# EAGLE board BrewTrollerPhoenix (EAGLE 7.1.0), part 1 of 2
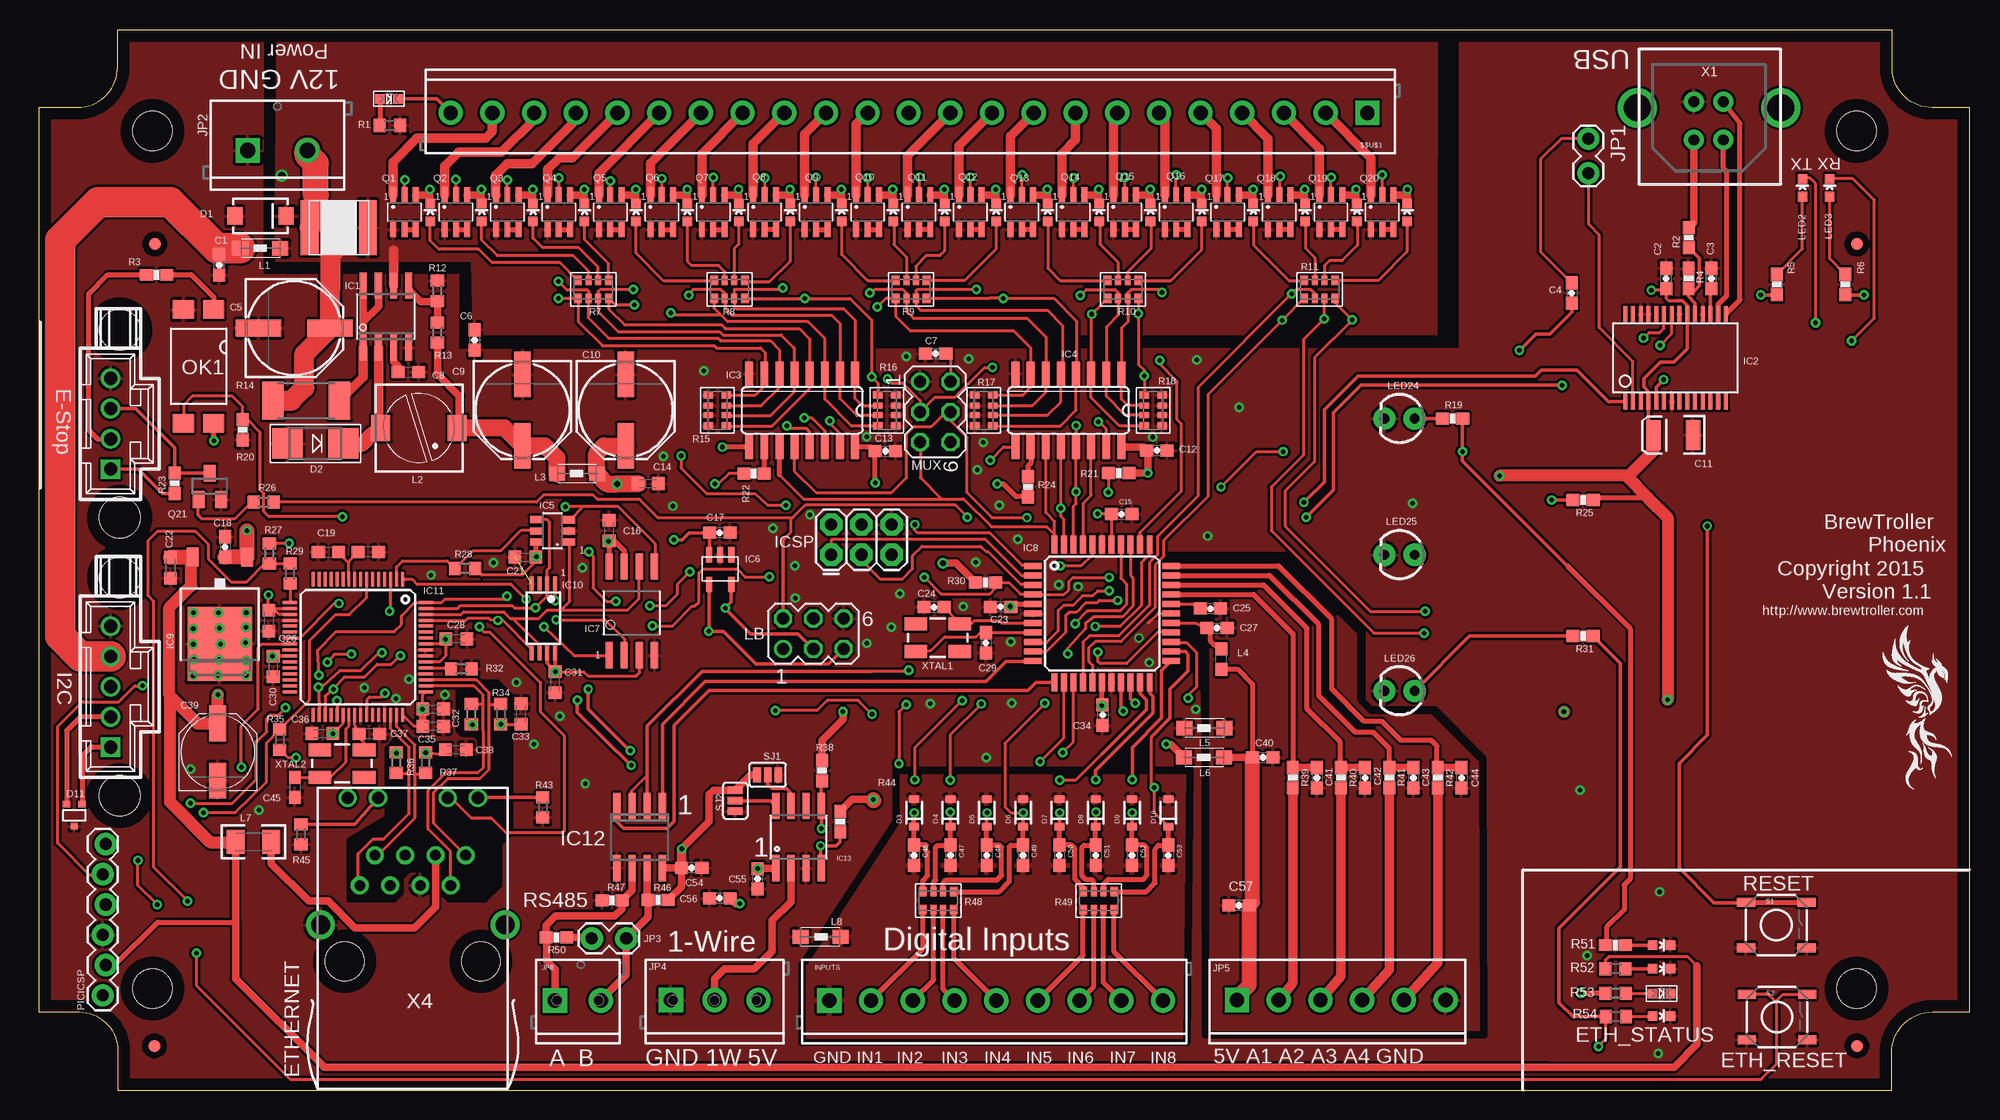
[diagram p0: board, top side]
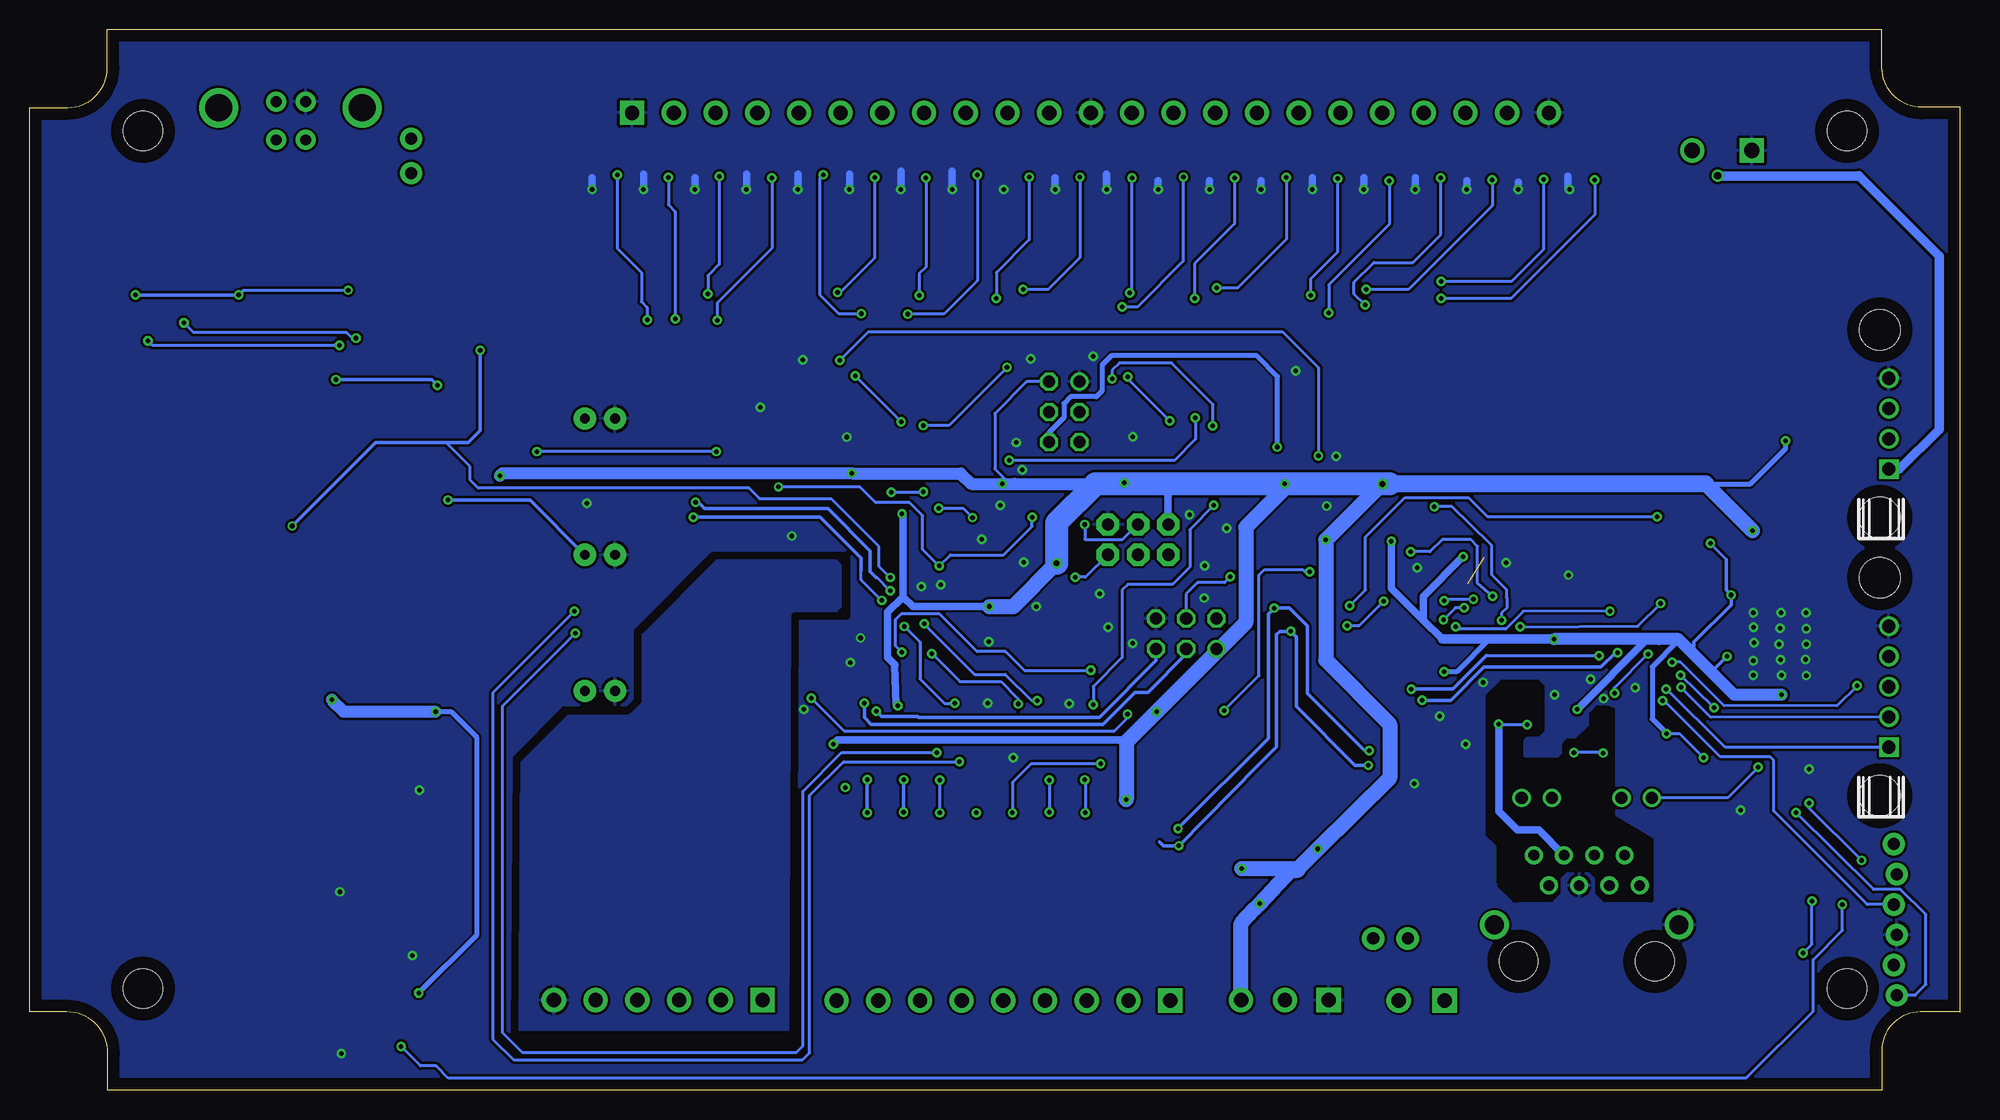
[diagram p1: board, bottom side, seen from below]

Size 162 x 89 mm. Coordinates in mm from the lower left corner, seen from the top.
Outline: 0,6.53 0,82.5 3.2,82.5 arc90 6.55,85.86 6.55,89 155.5,89 155.5,85.79 arc90 158.81,82.47 162,82.47 162,6.55 158.88,6.55 arc90 155.45,3.12 155.45,0 6.58,0 6.58,3.29 arc90 3.32,6.55 0,6.55
Copper layers (1*16): Top 0.035mm / dielectric 1.5mm / Bottom 0.035mm
Design rules "default": minimum track width 10mil, minimum drill 24mil, track to track 8mil, track to pad 8mil, pad to pad 8mil, via to via 8mil, smd to smd 8mil, copper to edge 40mil, drill to drill 10mil, minimum pad ring 10mil, minimum via ring 8mil, stop-mask expansion 0mil, vias tented up to drill 15mil, thermal gap 10mil
Net classes: 1 PWR: width 0.508 mm; 2 GND: width 0.635 mm
tRestrict: 53 lines
bRestrict: 49 lines

## Footprints (pad centres in the part's own frame; a part is rotated, then mirrored left to right if it is on the bottom)
STAND-OFF = hole 3.302: 0,0
FIDUCIAL_1MM = smd 1 x 1: 1 0,0
SCREWTERMINAL3.5MM-23 = drill 1.2 pad 2.032 square: 1 0,0 | drill 1.2 pad 2.032: 2 3.5,0; 3 7,0; 4 10.5,0; 5 14,0; 6 17.5,0; 7 21,0; 8 24.5,0; 9 28,0; 10 31.5,0; 11 35,0; 12 38.5,0; 13 41.94,0; 14 45.44,0; 15 48.94,0; 16 52.44,0; 17 55.94,0; 18 59.44,0; 19 62.94,0; 20 66.44,0; 21 69.94,0; 22 73.44,0; 23 76.94,0
0603-CAP = smd 1.1 x 1: 1 -0.85,0; 2 0.85,0
PANASONIC_E = smd 3.8 x 1.4: + 3,0; - -3,0
C0603 = smd 1.1 x 1: 1 -0.85,0; 2 0.85,0
EIA3528 = smd 1.2 x 2.5: A 1.65,0; C -1.65,0
C0603K = smd 1.05 x 1.08: 1 -0.875,0; 2 0.875,0
PANASONIC_D = smd 3 x 1.4: + 2.4,0; - -2.4,0
SMA-DIODE = smd 1.27 x 1.47: A -2.15,0; C 2.15,0
SMADIODE = smd 2.54 x 2.54: A 2.349,0; C -2.349,0
SOD-323 = smd 0.63 x 0.83: 1 -1.15,0; 2 1.15,0
SOT23-3 = smd 0.6 x 0.55: 1 -0.65,-0.925; 2 0.65,-0.925; 3 0,0.925
SOIC8 = smd 0.6 x 2.2: 1 -1.905,-2.6; 2 -0.635,-2.6; 3 0.635,-2.6; 4 1.905,-2.6; 5 1.905,2.6; 6 0.635,2.6; 7 -0.635,2.6; 8 -1.905,2.6
SSOP28DB = smd 0.348 x 1.397: 1 -4.225,-3.656; 2 -3.575,-3.656; 3 -2.925,-3.656; 4 -2.275,-3.656; 5 -1.625,-3.656; 6 -0.975,-3.656; 7 -0.325,-3.656; 8 0.325,-3.656; 9 0.975,-3.656; 10 1.625,-3.656; 11 2.275,-3.656; 12 2.925,-3.656; 13 3.575,-3.656; 14 4.225,-3.656; 15 4.225,3.656; 16 3.575,3.656; 17 2.925,3.656; 18 2.275,3.656; 19 1.625,3.656; 20 0.975,3.656; 21 0.325,3.656; 22 -0.325,3.656; 23 -0.975,3.656; 24 -1.625,3.656; 25 -2.275,3.656; 26 -2.925,3.656; 27 -3.575,3.656; 28 -4.225,3.656
SO16 = smd 0.66 x 2.032: 1 -4.445,-3.073; 2 -3.175,-3.073; 3 -1.905,-3.073; 4 -0.635,-3.073; 5 0.635,-3.073; 6 1.905,-3.073; 7 3.175,-3.073; 8 4.445,-3.073; 9 4.445,3.073; 10 3.175,3.073; 11 1.905,3.073; 12 0.635,3.073; 13 -0.635,3.073; 14 -1.905,3.073; 15 -3.175,3.073; 16 -4.445,3.073
SOT23-6 = smd 0.6 x 1: 1 -0.95,-1.39; 2 0,-1.39; 3 0.93,-1.41; 4 0.95,1.38; 5 -0.01,1.37; 6 -0.95,1.39
SOT-23A-5 = smd 0.508 x 1.27: GND 0.94,0; NC 0,0; SCLK 1.88,2.489; SDA 0,2.489; VDD 1.88,0
SO8W = smd 0.61 x 2.21: 1 -1.905,-3.569; 2 -0.635,-3.569; 3 0.635,-3.569; 4 1.905,-3.569; 5 1.905,3.886; 6 0.635,3.886; 7 -0.635,3.886; 8 -1.905,3.886
TQFP44 = smd 1.5 x 0.5: 1 -5.8,4; 2 -5.8,3.2; 3 -5.8,2.4; 4 -5.8,1.6; 5 -5.8,0.8; 6 -5.8,0; 7 -5.8,-0.8; 8 -5.8,-1.6; 9 -5.8,-2.4; 10 -5.8,-3.2; 11 -5.8,-4; 23 5.8,-4; 24 5.8,-3.2; 25 5.8,-2.4; 26 5.8,-1.6; 27 5.8,-0.8; 28 5.8,0; 29 5.8,0.8; 30 5.8,1.6; 31 5.8,2.4; 32 5.8,3.2; 33 5.8,4 | smd 0.5 x 1.5: 12 -4,-5.8; 13 -3.2,-5.8; 14 -2.4,-5.8; 15 -1.6,-5.8; 16 -0.8,-5.8; 17 0,-5.8; 18 0.8,-5.8; 19 1.6,-5.8; 20 2.4,-5.8; 21 3.2,-5.8; 22 4,-5.8; 34 4,5.8; 35 3.2,5.8; 36 2.4,5.8; 37 1.6,5.8; 38 0.8,5.8; 39 0,5.8; 40 -0.8,5.8; 41 -1.6,5.8; 42 -2.4,5.8; 43 -3.2,5.8; 44 -4,5.8
TO252 = smd 1 x 1.6: 1 -2.28,-4.8; 2 2.28,-4.8 | smd 5.4 x 6.2: 3 0,2.5
TSSOP8 = smd 1.2 x 0.35: 1 -2.925,0.975; 2 -2.925,0.325; 3 -2.925,-0.325; 4 -2.925,-0.975; 5 2.925,-0.975; 6 2.925,-0.325; 7 2.925,0.325; 8 2.925,0.975
TQFP64-10X10 = smd 1.2 x 0.25: 1 -5.7,3.75; 2 -5.7,3.25; 3 -5.7,2.75; 4 -5.7,2.25; 5 -5.7,1.75; 6 -5.7,1.25; 7 -5.7,0.75; 8 -5.7,0.25; 9 -5.7,-0.25; 10 -5.7,-0.75; 11 -5.7,-1.25; 12 -5.7,-1.75; 13 -5.7,-2.25; 14 -5.7,-2.75; 15 -5.7,-3.25; 16 -5.7,-3.75; 33 5.7,-3.75; 34 5.7,-3.25; 35 5.7,-2.75; 36 5.7,-2.25; 37 5.7,-1.75; 38 5.7,-1.25; 39 5.7,-0.75; 40 5.7,-0.25; 41 5.7,0.25; 42 5.7,0.75; 43 5.7,1.25; 44 5.7,1.75; 45 5.7,2.25; 46 5.7,2.75; 47 5.7,3.25; 48 5.7,3.75 | smd 0.25 x 1.2: 17 -3.75,-5.7; 18 -3.25,-5.7; 19 -2.75,-5.7; 20 -2.25,-5.7; 21 -1.75,-5.7; 22 -1.25,-5.7; 23 -0.75,-5.7; 24 -0.25,-5.7; 25 0.25,-5.7; 26 0.75,-5.7; 27 1.25,-5.7; 28 1.75,-5.7; 29 2.25,-5.7; 30 2.75,-5.7; 31 3.25,-5.7; 32 3.75,-5.7; 49 3.75,5.7; 50 3.25,5.7; 51 2.75,5.7; 52 2.25,5.7; 53 1.75,5.7; 54 1.25,5.7; 55 0.75,5.7; 56 0.25,5.7; 57 -0.25,5.7; 58 -0.75,5.7; 59 -1.25,5.7; 60 -1.75,5.7; 61 -2.25,5.7; 62 -2.75,5.7; 63 -3.25,5.7; 64 -3.75,5.7
SO8 = smd 0.61 x 2.21: 1 -1.905,-2.616; 2 -0.635,-2.616; 3 0.635,-2.616; 4 1.905,-2.616; 5 1.905,2.616; 6 0.635,2.616; 7 -0.635,2.616; 8 -1.905,2.616
2X3 = drill 1.016 pad 1.88 octagon: 1 0,0; 2 0,2.54; 3 2.54,0; 4 2.54,2.54; 5 5.08,0; 6 5.08,2.54
SCREWTERMINAL3.5MM-9 = drill 1.2 pad 2.032 square: 1 0,0 | drill 1.2 pad 2.032: 2 3.5,0; 3 7,0; 4 10.5,0; 5 14,0; 6 17.5,0; 7 21,0; 8 24.5,0; 9 28,0
1X02_LOCK = drill 1.016 pad 1.88: 1 -0.178,0; 2 2.718,0
SCREWTERMINAL-5MM-2 = drill 1.3 pad 2.032 square: 1 0,0 | drill 1.3 pad 2.032: 2 5,0
SCREWTERMINAL-3.5MM-3_LOCK.007S = drill 1.2 pad 2.032 square: 1 -0.178,0 | drill 1.2 pad 2.032: 2 3.5,0; 3 7.178,0
SCREWTERMINAL3.5MM6 = drill 1.2 pad 2.032 square: 1 0,0 | drill 1.2 pad 2.032: 2 3.5,0; 3 7,0; 4 10.5,0; 5 14,0; 6 17.5,0
SCREWTERMINAL-3.5MM-2_LOCK = drill 1.2 pad 2.032 square: 1 -0.178,0 | drill 1.2 pad 2.032: 2 3.678,0
1206 = smd 1.35 x 1.2: 1 -1.7,0; 2 1.65,0
PIS2816 = smd 2.2 x 1.6: 1 0,3.2; 2 0,-3.2
0603 = smd 1.1 x 1: 1 -0.85,0; 2 0.85,0
C1206K = smd 1.5 x 2: 1 -1.5,0; 2 1.5,0
MA03-2 = drill 1.016: 1 -2.54,-1.27 | drill 1.016 octagon: 2 -2.54,1.27; 3 0,-1.27; 4 0,1.27; 5 2.54,-1.27; 6 2.54,1.27
CHIPLED_0603 = smd 0.8 x 0.8: A 0,-0.75; C 0,0.75
LED-0603 = smd 0.8 x 0.8: A 0,-0.75; C 0,0.75
LED3MM = drill 0.813 pad 1.88: A -1.27,0; K 1.27,0
SMD4-7 = smd 1.78 x 1.55: 1 -1.27,-4.77; 2 1.27,-4.77; 3 1.27,4.77; 4 -1.27,4.77
1X06-SIP_LOCK = drill 1.016 pad 1.88: 1 0,0; 2 2.54,-0.254; 3 5.08,0; 4 7.62,-0.254; 5 10.16,0; 6 12.7,-0.254
SC-74 = smd 0.5 x 1.3: 1 -0.95,1.45; 2 0,1.45; 3 0.95,1.45; 4 0.95,-1.45; 5 0,-1.45; 6 -0.95,-1.45
SOT23 = smd 1 x 1.4: 1 -0.95,-1.1; 2 0.95,-1.1; 3 0,1.1
R0603 = smd 1 x 1.1: 1 -0.85,0; 2 0.85,0
0603-RES = smd 1.1 x 1: 1 -0.85,0; 2 0.85,0
RESPACK_4X0603 = smd 0.65 x 0.8: 1 -1.3,-0.75; 4 1.3,-0.75; 5 1.3,0.75; 8 -1.3,0.75 | smd 0.5 x 0.8: 2 -0.4,-0.75; 3 0.4,-0.75; 6 0.4,0.75; 7 -0.4,0.75
R2512 = smd 1.8 x 3.2: 1 -2.8,0; 2 2.8,0
TACTILE_SWITCH_SMD = smd 1.524 x 0.762: 1 -2.54,1.905; 2 2.54,1.905; 3 -2.54,-1.905; 4 2.54,-1.905
SJ_3_PASTE1&2 = smd 0.635 x 1.27: 1 -0.889,0; 2 0,0; 3 0.889,0
2018 = smd 1.5 x 4.6: P$1 -2.45,0; P$2 2.45,0
USB-B-PTH-VERTICAL = drill 0.914 pad 1.676: D+ 4.826,4.394; D- 4.826,7.595; GND 7.315,4.394; VBUS 7.315,7.595 | drill 2.286: P$1 0,4.902; P$2 12.04,4.902
70545-POS4 = drill 1.1 square: P$1 3.81,0 | drill 1.1: P$2 1.27,0; P$3 -1.27,0; P$4 -3.81,0 | hole 3.404: -7.874,0.762; 7.874,0.762
70545-POS5 = drill 1.1 square: P$1 5.08,0 | drill 1.1: P$2 2.54,0; P$3 0,0; P$4 -2.54,0; P$5 -5.08,0 | hole 3.404: -9.144,0.762; 9.144,0.762
SI-50014 = drill 0.9 pad 1.5: 1 4.445,8.382; 2 3.175,5.842; 3 1.905,8.382; 4 0.635,5.842; 5 -0.635,8.382; 6 -1.905,5.842; 7 -3.175,8.382; 8 -4.445,5.842 | drill 1.016 pad 1.5: A1 -5.461,13.208; A2 2.921,13.208; C1 -2.921,13.208; C2 5.461,13.208 | drill 1.6 pad 2.2: S1 -7.747,2.54; S2 7.747,2.54 | hole 3.251: -5.715,-0.508; 5.715,-0.508
CRYSTAL-SMD-5X3 = smd 1.9 x 1.1: 1 -1.85,-1.15; 2 1.85,-1.15; 3 1.85,1.15; 4 -1.85,1.15

## Placement (x,y rotation side)
$$$$$$U$1  [STAND-OFF]  9.5,80.51 0 top
$$$$$$U$2  [STAND-OFF]  152.5,8.51 0 top
$$$$U$1  [STAND-OFF]  152.5,80.51 0 top
$$$$U$2  FIDUCIAL  [FIDUCIAL_1MM]  152.53,71.02 0 top
$$$$U$3  [STAND-OFF]  9.5,8.5 0 top
$$U$1  M23  [SCREWTERMINAL3.5MM-23]  111.45,82.03 180 top
$$U$2  FIDUCIAL  [FIDUCIAL_1MM]  9.68,71.02 0 top
BOARDZERO  FIDUCIAL  [FIDUCIAL_1MM]  9.65,3.71 0 top
C1  .1uF  [0603-CAP]  15.09,69.27 90 top
C2  .1uF  [0603-CAP]  136.53,68.12 90 top
C3  .1uF  [0603-CAP]  140.31,68.12 90 top
C4  .1uF  [0603-CAP]  128.6,66.9 270 top
C5  100uf  [PANASONIC_E]  21.39,63.96 0 top
C6  .1uF  [0603-CAP]  36.53,62.97 270 top
C7  .1uF  [0603-CAP]  75.21,61.82 0 top
C8  160pF  [C0603]  30.96,60.27 0 top
C9  1000uf  [PANASONIC_E]  40.54,57.07 270 top
C10  1000uf  [PANASONIC_E]  49.2,57.07 270 top
C11  4.7uF  [EIA3528]  137.13,54.97 180 top
C12  .1uF  [0603-CAP]  93.78,53.7 0 top
C13  .1uF  [0603-CAP]  70.99,53.64 0 top
C14  .1uF  [C0603K]  51.08,50.9 180 top
C15  .1uF  [0603-CAP]  90.83,48.34 0 top
C16  .1uF  [C0603K]  47.8,46.96 90 top
C17  .1uF  [0603-CAP]  57.1,46.79 0 top
C18  .1uF  [0603-CAP]  15.57,45.59 270 top
C19  1uF  [C0603]  24.26,45.16 0 top
C20  .1uF  [C0603]  27.61,45.16 180 top
C21  .1uF  [C0603K]  40.79,44.73 180 top
C22  .1uF  [C0603K]  11,43.84 90 top
C23  .1uF  [0603-CAP]  80.67,40.56 180 top
C24  18pf  [0603-CAP]  75.08,40.54 180 top
C25  .1uF  [0603-CAP]  98.27,40.41 0 top
C26  .1uF  [C0603K]  19.25,39.4 270 top
C27  .1uF  [0603-CAP]  98.83,38.79 0 top
C28  .1uF  [C0603K]  35,37.87 0 top
C29  18pf  [0603-CAP]  79.43,37.54 270 top
C30  .1uF  [C0603K]  19.61,35.56 90 top
C31  .1uF  [C0603K]  43.28,34.24 270 top
C32  .1uF  [C0603K]  33.05,31.98 0 top
C33  .1uF  [C0603K]  40.41,31.57 90 top
C34  .1uF  [0603-CAP]  89.23,31.47 270 top
C35  .1uF  [C0603K]  33.05,30.53 0 top
C36  .1uF  [C0603K]  23.75,29.92 180 top
C37  18pF  [C0603]  27.69,29.89 180 top
C38  .1uF  [C0603K]  34.95,28.57 0 top
C39  68uF  [PANASONIC_D]  14.96,28.37 90 top
C40  .1uF  [0603-CAP]  102.67,27.91 0 top
C41  .33uF  [0603-CAP]  107.21,26.21 270 top
C42  .33uF  [0603-CAP]  111.25,26.21 270 top
C43  .33uF  [0603-CAP]  115.32,26.21 270 top
C44  .33uF  [0603-CAP]  119.35,26.21 270 top
C45  18pF  [C0603]  21.44,25.4 270 top
C46  [0603-CAP]  73.41,19.71 270 top
C47  [0603-CAP]  76.45,19.71 270 top
C48  [0603-CAP]  79.5,19.71 270 top
C49  [0603-CAP]  82.55,19.71 270 top
C50  [0603-CAP]  85.6,19.71 270 top
C51  [0603-CAP]  88.65,19.71 270 top
C52  [0603-CAP]  91.69,19.71 270 top
C53  [0603-CAP]  94.74,19.71 270 top
C54  .1uF  [0603-CAP]  54.74,18.64 180 top
C55  .1uF  [0603-CAP]  60.27,17.73 270 top
C56  .1uF  [0603-CAP]  57.1,16.1 180 top
C57  .1uF  [0603-CAP]  100.69,15.5 180 top
D1  TVS  [SMA-DIODE]  18.55,73.38 0 top
D2  2A SHOTKEY  [SMADIODE]  23.16,54.28 180 top
D3  DIODE-ZENER-BZT52  [SOD-323]  73.41,23.27 90 top
D4  DIODE-ZENER-BZT52  [SOD-323]  76.45,23.27 90 top
D5  DIODE-ZENER-BZT52  [SOD-323]  79.5,23.27 90 top
D6  DIODE-ZENER-BZT52  [SOD-323]  82.55,23.27 90 top
D7  DIODE-ZENER-BZT52  [SOD-323]  85.6,23.27 90 top
D8  DIODE-ZENER-BZT52  [SOD-323]  88.65,23.27 90 top
D9  DIODE-ZENER-BZT52  [SOD-323]  91.69,23.27 90 top
D10  DIODE-ZENER-BZT52  [SOD-323]  94.74,23.27 90 top
D11  TVS  [SOT23-3]  2.92,23.06 180 top
IC1  [SOIC8]  29.08,64.92 0 top
IC2  FT232RLSSOP  [SSOP28DB]  137.31,61.47 0 top
IC3  74LS595D  [SO16]  64.01,57.05 180 top
IC4  74LS595D  [SO16]  86.36,57.05 180 top
IC5  25AA02E48  [SOT23-6]  43.05,46.94 90 top
IC6  TC74  [SOT-23A-5]  58.06,44.93 180 top
IC7  SST25VF032B  [SO8W]  49.71,40.06 0 top
IC8  ATMEGA1284  [TQFP44]  89.18,40.01 0 top
IC9  3.3V  [TO252]  15.14,39.93 180 top
IC10  23K256  [TSSOP8]  42.29,39.6 270 top
IC11  PIC18F67J60  [TQFP64-10X10]  26.72,37.19 270 top
IC12  LTC485S  [SOIC8]  50.37,21.23 180 top
IC13  DS2482  [SO8]  63.7,21.23 0 top
ICSP  AVR_SPI_PRG_6PTH  [2X3]  66.45,44.93 0 top
INPUTS  M09  [SCREWTERMINAL3.5MM-9]  66.29,7.52 0 top
JP1  AutoReset  [1X02_LOCK]  130,79.68 270 top
JP2  PWRIN  [SCREWTERMINAL-5MM-2]  17.48,78.87 0 top
JP3  Termination  [1X02_LOCK]  46.53,12.73 0 top
JP4  OneWire  [SCREWTERMINAL-3.5MM-3_LOCK.007S]  53.16,7.54 0 top
JP5  M063.5MM6  [SCREWTERMINAL3.5MM6]  100.51,7.54 0 top
JP6  [SCREWTERMINAL-3.5MM-2_LOCK]  43.43,7.52 0 top
L1  FB  [1206]  18.56,70.66 0 top
L2  5.4uH  [PIS2816]  31.85,55.58 270 top
L3  FB  [1206]  45.14,51.74 0 top
L4  10uH  [0603]  99.19,36.17 90 top
L5  FB  [1206]  97.79,30.38 0 top
L6  FB  [1206]  97.76,27.91 0 top
L7  FERRITE  [C1206K]  17.96,20.83 0 top
L8  FB  [1206]  65.53,12.85 180 top
LB  Light Board  [MA03-2]  64.95,38.3 0 top
LED1  12V  [CHIPLED_0603]  29.33,83.21 270 top
LED2  [LED-0603]  147.96,75.74 0 top
LED3  [LED-0603]  150.24,75.74 0 top
LED4  [LED-0603]  58.7,73.69 0 top
LED5  [LED-0603]  63.02,73.69 0 top
LED6  [LED-0603]  67.34,73.69 0 top
LED7  [LED-0603]  71.65,73.69 0 top
LED8  [LED-0603]  75.97,73.69 0 top
LED9  [LED-0603]  80.29,73.69 0 top
LED10  [LED-0603]  84.61,73.69 0 top
LED11  [LED-0603]  88.93,73.69 0 top
LED12  [LED-0603]  93.24,73.69 0 top
LED13  [LED-0603]  97.56,73.69 0 top
LED14  [LED-0603]  101.88,73.69 0 top
LED15  [LED-0603]  106.22,73.69 0 top
LED16  [LED-0603]  110.57,73.69 0 top
LED17  [LED-0603]  114.79,73.69 0 top
LED18  [LED-0603]  32.79,73.68 0 top
LED19  [LED-0603]  37.11,73.68 0 top
LED20  [LED-0603]  41.43,73.68 0 top
LED21  [LED-0603]  45.75,73.68 0 top
LED22  [LED-0603]  50.06,73.68 0 top
LED23  [LED-0603]  54.38,73.68 0 top
LED24  [LED3MM]  114.15,56.36 180 top
LED25  [LED3MM]  114.15,44.93 180 top
LED26  [LED3MM]  114.15,33.5 180 top
LED27  HEARTBEAT  [LED-0603]  136.14,12.17 270 top
LED28  3.3V  [LED-0603]  136.14,10.19 270 top
LED29  Power  [CHIPLED_0603]  136.14,8.1 270 top
LED30  [LED-0603]  136.14,6.22 270 top
MUX  [MA03-2]  75.18,56.92 270 top
OK1  PC817  [SMD4-7]  13.36,60.76 180 top
PICICSP  PIC-ICSP  [1X06-SIP_LOCK]  5.31,7.95 90 top
Q1  IMD10A  [SC-74]  30.63,73.69 0 top
Q2  IMD10A  [SC-74]  34.95,73.69 0 top
Q3  IMD10A  [SC-74]  39.27,73.69 0 top
Q4  IMD10A  [SC-74]  43.59,73.69 0 top
Q5  IMD10A  [SC-74]  47.9,73.69 0 top
Q6  IMD10A  [SC-74]  52.22,73.69 0 top
Q7  IMD10A  [SC-74]  56.54,73.69 0 top
Q8  IMD10A  [SC-74]  60.86,73.69 0 top
Q9  IMD10A  [SC-74]  65.18,73.69 0 top
Q10  IMD10A  [SC-74]  69.49,73.69 0 top
Q11  IMD10A  [SC-74]  73.81,73.69 0 top
Q12  IMD10A  [SC-74]  78.13,73.69 0 top
Q13  IMD10A  [SC-74]  82.45,73.69 0 top
Q14  IMD10A  [SC-74]  86.77,73.69 0 top
Q15  IMD10A  [SC-74]  91.08,73.69 0 top
Q16  IMD10A  [SC-74]  95.4,73.69 0 top
Q17  IMD10A  [SC-74]  99.72,73.69 0 top
Q18  IMD10A  [SC-74]  104.05,73.69 0 top
Q19  IMD10A  [SC-74]  108.39,73.69 0 top
Q20  IMD10A  [SC-74]  112.69,73.69 0 top
Q21  [SOT23]  14.3,50.67 0 top
R1  1K  [R0603]  29.41,80.98 0 top
R2  4.7k  [0603-RES]  138.43,71.55 90 top
R3  3.3k  [0603-RES]  9.83,68.43 0 top
R4  10k  [0603-RES]  138.4,68.12 270 top
R5  330  [0603-RES]  145.8,67.61 270 top
R6  330  [0603-RES]  151.56,67.61 270 top
R7  [RESPACK_4X0603]  46.48,67.21 0 top
R8  330  [RESPACK_4X0603]  57.91,67.21 0 top
R9  330  [RESPACK_4X0603]  73.15,67.21 0 top
R10  330  [RESPACK_4X0603]  90.93,67.21 0 top
R11  330  [RESPACK_4X0603]  107.44,67.21 0 top
R12  10k  [R0603]  33.4,67.08 270 top
R13  30k  [R0603]  33.4,63.58 90 top
R14  .10  [R2512]  22.38,57.86 0 top
R15  [RESPACK_4X0603]  56.9,57.05 90 top
R16  [RESPACK_4X0603]  71.12,57.05 270 top
R17  [RESPACK_4X0603]  79.25,57.05 270 top
R18  [RESPACK_4X0603]  93.47,57.05 90 top
R19  330  [0603-RES]  118.59,56.36 180 top
R20  100k  [0603-RES]  17.04,55.42 270 top
R21  10K  [0603-RES]  90.58,51.79 0 top
R22  10K  [0603-RES]  59.97,51.77 180 top
R23  10k  [0603-RES]  11.35,50.93 90 top
R24  10K  [0603-RES]  82.96,50.65 270 top
R25  330  [0603-RES]  129.54,49.53 180 top
R26  1k  [R0603]  18.82,49.35 0 top
R27  10K  [R0603]  19.3,45.03 90 top
R28  10K  [R0603]  35.71,43.79 0 top
R29  180  [R0603]  21.03,43.36 270 top
R30  10k  [0603-RES]  79.4,42.6 180 top
R31  180  [0603-RES]  129.54,38.1 180 top
R32  2.26K  [R0603]  35.41,35.36 180 top
R33  49.9  [R0603]  36.25,31.55 90 top
R34  49.9  [R0603]  38.71,31.55 90 top
R35  4.7k  [R0603]  20.17,29.41 270 top
R36  49.9  [R0603]  29.95,27.48 270 top
R37  49.9  [R0603]  32.41,27.48 270 top
R38  2k  [0603-RES]  65.68,26.8 90 top
R39  10k  [0603-RES]  105.18,26.21 270 top
R40  10k  [0603-RES]  109.22,26.21 270 top
R41  10k  [0603-RES]  113.28,26.21 270 top
R42  10k  [0603-RES]  117.35,26.21 270 top
R43  180  [R0603]  42.24,23.72 90 top
R44  2k  [0603-RES]  67.21,22.53 90 top
R45  180  [R0603]  21.95,21.46 90 top
R46  100  [0603-RES]  51.92,15.95 180 top
R47  100  [0603-RES]  48.06,15.93 180 top
R48  3.3k  [RESPACK_4X0603]  75.44,15.9 0 top
R49  3.3k  [RESPACK_4X0603]  88.9,15.9 0 top
R50  100  [0603-RES]  43.38,12.8 0 top
R51  330  [0603-RES]  132.26,12.17 0 top
R52  180  [R0603]  132.26,10.19 0 top
R53  330  [R0603]  132.28,8.13 180 top
R54  180  [R0603]  132.31,6.17 0 top
S1  [TACTILE_SWITCH_SMD]  145.77,13.84 0 top
S2  [TACTILE_SWITCH_SMD]  145.82,6.12 0 top
SJ1  [SJ_3_PASTE1&2]  61.11,26.47 0 top
SJ2  [SJ_3_PASTE1&2]  58.39,24.28 270 top
SKEW  FIDUCIAL  [FIDUCIAL_1MM]  152.53,3.71 0 top
U$6  PTC2018  [2018]  25.12,72.39 180 top
X1  USBPTH-VERTICAL  [USB-B-PTH-VERTICAL]  146.15,87.35 180 top
X2  HEADER_POS4_70545  [70545-POS4]  5.97,55.93 270 top
X3  HEADER_POS5_70545  [70545-POS5]  5.97,33.86 270 top
X4  SI-50014  [SI-50014]  31.33,11.33 0 top
XTAL1  16mhz  [CRYSTAL-SMD-5X3]  75.39,37.97 180 top
XTAL2  25Mhz  [CRYSTAL-SMD-5X3]  25.4,27.41 180 top

## Library data of the parts
$$$$$$U$1 $$$$$$U$2 $$$$U$1 $$$$U$3 C1-C7 C9-C13 C15 C17 C18 C23-C25 C27 C29 C34 C39-C44 C46-C57 D1 D3-D10 IC2-IC4 ICSP JP1-JP4 JP6 L4 LED2-LED28 LED30 PICICSP Q21 R2-R6 R19-R25 R30 R31 R38-R42 R44 R46 R47 R50 R51 S1 S2 SJ1 SJ2 X1 XTAL1 XTAL2 = SparkFun
$$$$U$2 $$U$2 BOARDZERO SKEW = adafruit
$$U$1 D11 INPUTS U$6 = OSCSYS
C8 C19 C20 C37 C45 L2 R1 R12-R14 R26 R52 R53 = rcl
C14 C16 C21 C22 C26 C28 C30-C33 C35 C36 C38 R27-R29 R32-R37 R43 R45 R54 = resistor
D2 IC1 LED1 LED29 R7-R11 R15-R18 R48 R49 = microbuilder
IC5 = Bill_Twomey
IC6 = vs10
IC7 IC10 IC13 JP5 Q1-Q20 X4 = personal
IC8 = atmel
IC9 = linear
IC11 = microchip
IC12 = linear-technology
L1 L3 L5 L6 L8 = wuerth-elektronik
L7 = Bill_Twomey; CURRENT: 100mA-min
LB MUX = con-lstb; OC_FARNELL: unknown; OC_NEWARK: unknown
OK1 = optocoupler; MPN: SFH618A-5X007; OC_FARNELL: unknown; OC_NEWARK: 43K9546
X2 X3 = con-molex-c-grid-sl

## Nets
5V [PWR]: C2.1 C7.2 C10.+ C11.A C12.1 C13.1 C14.2 C15.1 C17.1 C18.2 C23.1 C34.1 C54.2 C55.1 C56.1 IC2.4 IC2.20 IC3.16 IC4.16 IC6.VDD IC8.5 IC8.17 IC8.38 IC9.1 IC12.8 IC13.1 ICSP.2 JP4.3 L3.2 L6.1 LB.1 MUX.2 OK1.4 R5.2 R6.2 R21.2 R22.2 R24.2 R25.1 R30.2 R38.2 R44.2 R46.1 R53.2 SJ1.1 SJ2.1
5VA: C40.1 C57.1 JP5.1 L4.1 L6.2
12V: C5.+ C6.1 D1.C IC1.6 L1.2 Q1.6 Q2.6 Q3.6 Q4.6 Q5.6 Q6.6 Q7.6 Q8.6 Q9.6 Q10.6 Q11.6 Q12.6 Q13.6 Q14.6 Q15.6 Q16.6 Q17.6 Q18.6 Q19.6 Q20.6 R1.2 R14.1 R23.1 U$6.P$1 X2.P$1
12VF [PWR]: C1.2 L1.1 X3.P$4
!MCLR: IC11.7 PICICSP.1 R35.1
+3V3: C16.1 C21.1 C22.2 C26.1 C28.1 C30.2 C31.1 C32.1 C35.1 C36.1 C39.+ IC5.6 IC7.3 IC7.7 IC7.8 IC9.2 IC10.7 IC10.8 IC11.18 IC11.19 IC11.26 IC11.38 IC11.48 IC11.49 IC11.54 IC11.57 L7.1 PICICSP.2 R27.2 R28.2 R35.2 R52.1
A: IC12.6 JP6.1 R47.1 R50.1
AGND: C25.2 C27.2 C40.2 C41.2 C42.2 C43.2 C44.2 C57.2 JP5.6 L5.2
B: IC12.7 JP3.2 JP6.2 R46.2
BT_STATUS: IC8.40 LB.2 R19.1 R26.2 R51.1
CLR_CONFIG: IC11.17 R29.2
CS_DF: IC7.1 IC11.3
CS_EEPROM: IC5.5 IC11.2 R28.1
CS_SRAM: IC10.1 IC11.1
CTSRTS: IC8.26 IC12.2 IC12.3
ESTOP: IC8.25 OK1.3 R20.1
ESTOP-EXT: R3.1 X2.P$2
ETH_MISO: IC5.4 IC7.2 IC10.2 IC11.63
ETH_MOSI: IC5.3 IC7.5 IC10.5 IC11.61
ETH_SCK: IC5.1 IC7.6 IC10.6 IC11.62
ETH_STATUS: IC11.64 LB.4 R31.1 R54.1
GND: $$U$1.1 $$U$1.12 $$U$1.23 C1.1 C2.2 C3.2 C5.- C6.2 C7.1 C8.2 C9.- C10.- C11.C C12.2 C13.2 C14.1 C15.2 C16.2 C17.2 C18.1 C19.1 C20.1 C21.2 C22.1 C23.2 C24.2 C26.2 C28.2 C29.2 C30.1 C31.2 C32.2 C33.2 C34.2 C35.2 C36.2 C37.1 C38.2 C39.- C45.2 C54.1 C55.2 C56.2 D1.A D2.A D11.3 IC1.4 IC2.7 IC2.18 IC2.21 IC2.25 IC2.26 IC3.8 IC4.8 IC5.2 IC6.GND IC7.4 IC8.6 IC8.18 IC8.28 IC8.39 IC9.3 IC10.4 IC11.9 IC11.20 IC11.25 IC11.41 IC11.45 IC11.52 IC11.55 IC11.56 IC12.5 IC13.3 ICSP.6 JP2.1 JP4.1 L5.1 L8.2 LB.6 LED1.C LED4.C LED5.C LED6.C LED7.C LED8.C LED9.C LED10.C LED11.C LED12.C LED13.C LED14.C LED15.C LED16.C LED17.C LED18.C LED19.C LED20.C LED21.C LED22.C LED23.C LED24.K LED25.K LED26.K LED27.C LED28.C LED29.C LED30.C MUX.1 OK1.2 PICICSP.3 Q1.3 Q2.3 Q3.3 Q4.3 Q5.3 Q6.3 Q7.3 Q8.3 Q9.3 Q10.3 Q11.3 Q12.3 Q13.3 Q14.3 Q15.3 Q16.3 Q17.3 Q18.3 Q19.3 Q20.3 Q21.2 R4.1 R12.1 R15.5 R15.6 R15.7 R15.8 R16.5 R16.6 R16.7 R16.8 R17.1 R17.2 R17.3 R17.4 R18.1 R18.2 R18.3 R18.4 R20.2 R32.1 R43.1 R45.1 R47.2 S1.3 S1.4 S2.3 S2.4 SJ1.3 SJ2.3 X1.GND X2.P$4 X3.P$5 X4.4 X4.S1
GNDIN: C46.2 C47.2 C48.2 C49.2 C50.2 C51.2 C52.2 C53.2 D3.2 D4.2 D5.2 D6.2 D7.2 D8.2 D9.2 D10.2 INPUTS.1 L8.1
IN1: C46.1 D3.1 IC8.37 R48.8
IN2: C47.1 D4.1 IC8.36 R48.7
IN3: C48.1 D5.1 IC8.35 R48.6
IN4: C49.1 D6.1 IC8.34 R48.5
IN5: C50.1 D7.1 IC8.21 R49.8
IN6: C51.1 D8.1 IC8.22 R49.7
IN7: C52.1 D9.1 IC8.23 R49.6
IN8: C53.1 D10.1 IC8.24 R49.5
LEDA: IC11.24 X4.A1
LEDB: IC11.23 X4.A2
MISO: IC8.2 ICSP.1
MOSI: IC8.1 ICSP.4
MR: IC3.10 R22.1
N$1: Q15.4 Q15.5
N$2: Q14.4 Q14.5
N$3: Q13.4 Q13.5
N$4: LED2.A R5.1
N$5: IC11.50 R33.2 X4.2
N$6: C29.1 IC8.8 XTAL1.3
N$7: LED28.A R52.2
N$8: IC11.47 R37.2 X4.7
N$9: LED27.A R51.2
N$10: Q21.3 R23.2 X2.P$3
N$11: C24.1 IC8.7 XTAL1.1
N$12: Q12.4 Q12.5
N$13: Q21.1 R26.1
N$14: Q11.4 Q11.5
N$15: D2.C IC1.2 L2.2
N$16: Q10.4 Q10.5
N$17: IC1.1 IC1.7 IC1.8 R14.2
N$18: IC1.5 R12.2 R13.2
N$19: C25.1 IC8.29
N$20: C8.1 IC1.3
N$21: C27.1 IC8.27 L4.2
N$22: Q9.4 Q9.5
N$23: Q8.4 Q8.5
N$24: Q7.4 Q7.5
N$25: Q6.4 Q6.5
N$26: IC11.46 R36.2 X4.8
N$27: IC11.53 R32.2
N$28: IC11.51 R34.2 X4.1
N$29: C33.1 L7.2 R33.1 R34.1 X4.3
N$30: C41.1 IC8.30 R39.1
N$31: C42.1 IC8.31 R40.1
N$32: C43.1 IC8.32 R41.1
N$33: C44.1 IC8.33 R42.1
N$34: JP5.2 R39.2
N$35: JP5.3 R40.2
N$36: JP5.4 R41.2
N$37: JP5.5 R42.2
N$38: Q5.4 Q5.5
N$39: IC4.10 R24.1
N$40: LED3.A R6.1
N$41: Q4.4 Q4.5
N$42: Q3.4 Q3.5
N$43: LED1.A R1.1
N$44: LED10.A R10.8
N$45: IC2.19 R2.1 R4.2
N$46: OK1.1 R3.2
N$47: C3.1 IC2.17
N$48: C38.1 R36.1 R37.1
N$49: R45.2 X4.C1
N$50: R43.2 X4.C2
N$51: C19.2 C20.2 IC11.10
N$52: Q16.4 Q16.5
N$53: C37.2 IC11.40 XTAL2.1
N$54: C45.1 IC11.39 XTAL2.3
N$55: LED24.A R19.2
N$56: LED25.A R25.2
N$57: LED26.A R31.2
N$58: LED30.A R54.2
N$59: LED11.A R10.7
N$60: LED12.A R10.6
N$61: LED13.A R10.5
N$62: LED6.A R9.8
N$63: LED7.A R9.7
N$64: LED8.A R9.6
N$65: LED9.A R9.5
N$66: LED22.A R8.8
N$67: LED23.A R8.7
N$68: LED4.A R8.6
N$69: LED5.A R8.5
N$70: LED18.A R7.8
N$71: IC2.16 X1.D-
N$72: LED19.A R7.7
N$73: LED29.A R53.1
N$74: JP2.2 U$6.P$2
N$75 [PWR]: C9.+ L2.1 L3.1 R13.1
N$76: LED20.A R7.6
N$77: C4.1 JP1.1
N$78: LED21.A R7.5
N$79: INPUTS.2 R48.1
N$80: INPUTS.3 R48.2
N$81: INPUTS.4 R48.3
N$82: INPUTS.5 R48.4
N$83: INPUTS.6 R49.1
N$84: INPUTS.7 R49.2
N$85: INPUTS.8 R49.3
N$86: INPUTS.9 R49.4
N$87: Q20.4 Q20.5
N$88: IC2.15 X1.D+
N$89: Q19.4 Q19.5
N$90: IC3.14 IC4.9
N$91: Q18.4 Q18.5
N$92: JP3.1 R50.2
N$93: Q17.4 Q17.5
N$95: LED14.A R11.8
N$96: LED15.A R11.7
N$97: LED16.A R11.6
N$98: LED17.A R11.5
N$101: IC13.7 SJ1.2
N$102: IC13.8 SJ2.2
N$105: Q2.4 Q2.5
N$109: Q1.4 Q1.5
OE: IC3.13 IC4.13 IC8.42 MUX.3 R21.1
ONEWIREDATA: IC13.2 JP4.2
OUT1: IC8.13 Q20.2 R11.4
OUT2: IC8.14 Q19.2 R11.3
OUT3: IC8.15 Q18.2 R11.2
OUT4: IC8.16 Q17.2 R11.1
OUT5: IC4.15 Q16.2 R10.4 R18.5
OUT6: IC4.1 Q15.2 R10.3 R18.6
OUT7: IC4.2 Q14.2 R10.2 R18.7
OUT8: IC4.3 Q13.2 R10.1 R18.8
OUT9: IC4.4 Q12.2 R9.4 R17.5
OUT10: IC4.5 Q11.2 R9.3 R17.6
OUT11: IC4.6 Q10.2 R9.2 R17.7
OUT12: IC4.7 Q9.2 R9.1 R17.8
OUT13: IC3.15 Q8.2 R8.4 R16.1
OUT14: IC3.1 Q7.2 R8.3 R16.2
OUT15: IC3.2 Q6.2 R8.2 R16.3
OUT16: IC3.3 Q5.2 R8.1 R16.4
OUT17: IC3.4 Q4.2 R7.4 R15.1
OUT18: IC3.5 Q3.2 R7.3 R15.2
OUT19: IC3.6 Q2.2 R7.2 R15.3
OUT20: IC3.7 Q1.2 R7.1 R15.4
PGC: IC11.42 PICICSP.5
PGD: IC11.37 PICICSP.4
RESET: IC2.2 JP1.2
RESET_BT: C4.2 IC8.4 ICSP.5 R30.1 S1.1 S1.2
RESET_ETH: R27.1 R29.1 S2.1 S2.2
RX: IC11.32
RXD: IC2.1 IC8.9
RXD1: IC8.11 IC12.1
SCK: IC8.3 ICSP.3
SCL: D11.2 IC6.SCLK IC8.19 IC11.34 IC13.4 LB.5 R44.1 X3.P$2
SDA: D11.1 IC6.SDA IC8.20 IC11.35 IC13.5 LB.3 R38.1 X3.P$1
SER: IC4.14 IC8.41
SER2: IC3.9 MUX.6
SH_CP: IC3.11 IC4.11 IC8.44 MUX.5
ST_CP: IC3.12 IC4.12 IC8.43 MUX.4
SWITCHED1: $$U$1.2 Q20.1
SWITCHED2: $$U$1.3 Q19.1
SWITCHED3: $$U$1.4 Q18.1
SWITCHED4: $$U$1.5 Q17.1
SWITCHED5: $$U$1.6 Q16.1
SWITCHED6: $$U$1.7 Q15.1
SWITCHED7: $$U$1.8 Q14.1
SWITCHED8: $$U$1.9 Q13.1
SWITCHED9: $$U$1.10 Q12.1
SWITCHED10: $$U$1.11 Q11.1
SWITCHED11: $$U$1.13 Q10.1
SWITCHED12: $$U$1.14 Q9.1
SWITCHED13: $$U$1.15 Q8.1
SWITCHED14: $$U$1.16 Q7.1
SWITCHED15: $$U$1.17 Q6.1
SWITCHED16: $$U$1.18 Q5.1
SWITCHED17: $$U$1.19 Q4.1
SWITCHED18: $$U$1.20 Q3.1
SWITCHED19: $$U$1.21 Q2.1
SWITCHED20: $$U$1.22 Q1.1
TX: IC11.31
TXD: IC2.5 IC8.10
TXD1: IC8.12 IC12.4
USB_RX_LED: IC2.22 LED3.C
USB_TX_LED: IC2.23 LED2.C
VBUS: R2.2 X1.VBUS